# Altium PCB mainPCB.PcbDoc
Units mil, origin at the board's own origin, x right, y up, seen from the top; angles counter-clockwise.
Board outline 4245 x 925 mil, 4 copper layers (Top Layer, GND, 5V, Bottom Layer), stack 23.756 mil thick; 58 components, 40 nets, 233 pads, 87 vias.
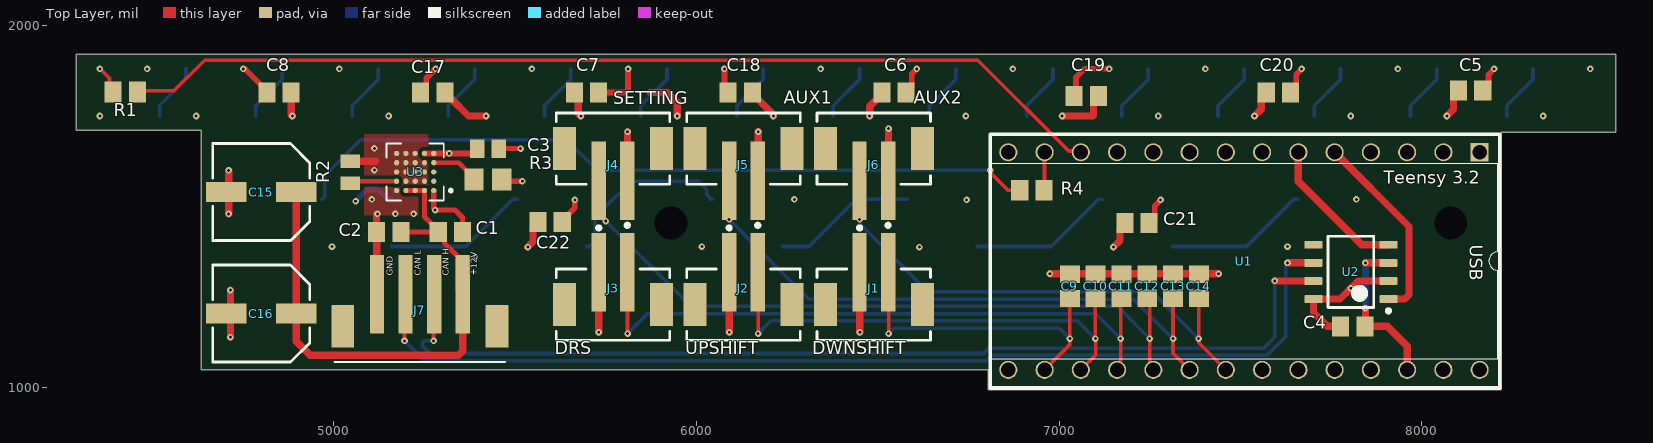
[diagram p0: Top Layer view]
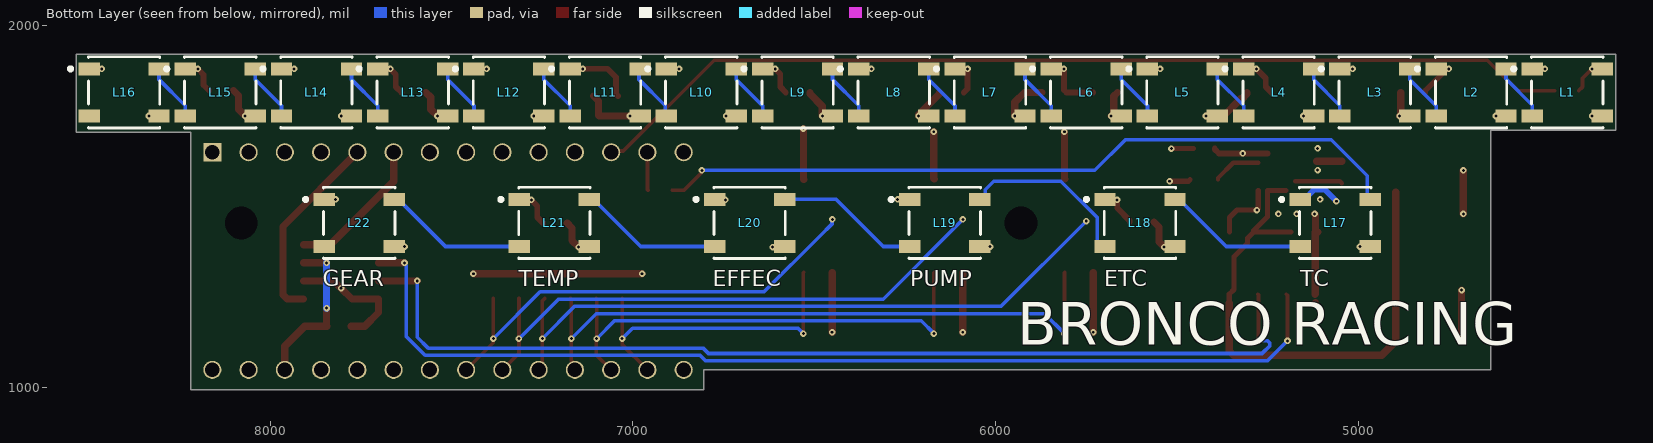
[diagram p1: Bottom Layer view, seen from below]
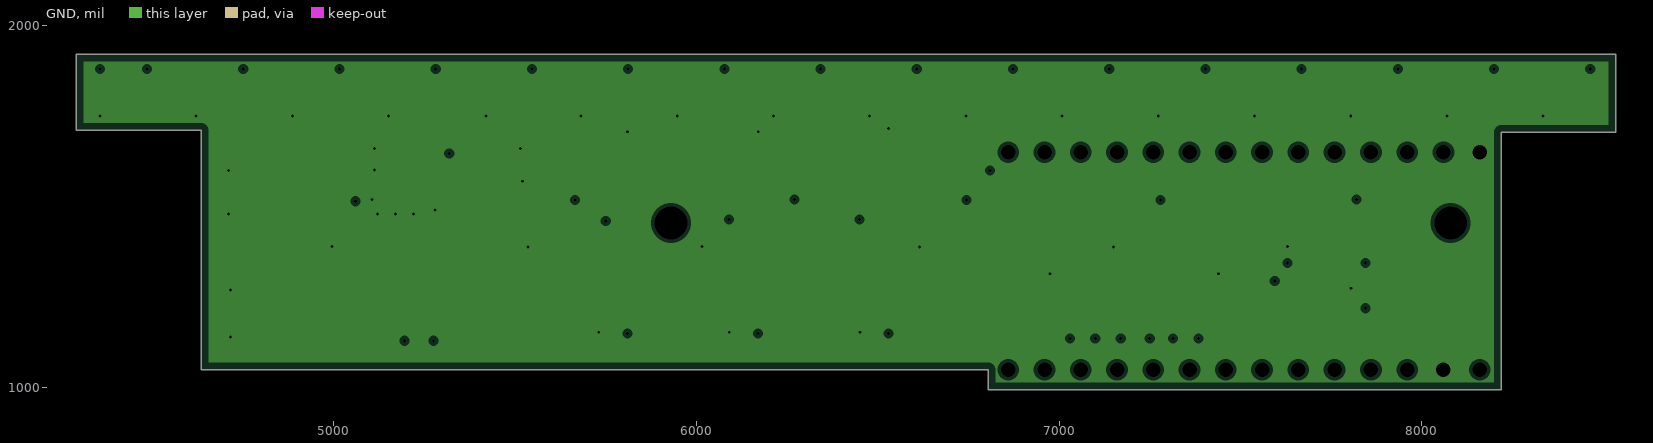
[diagram p2: GND, clearances drawn from the general rule]
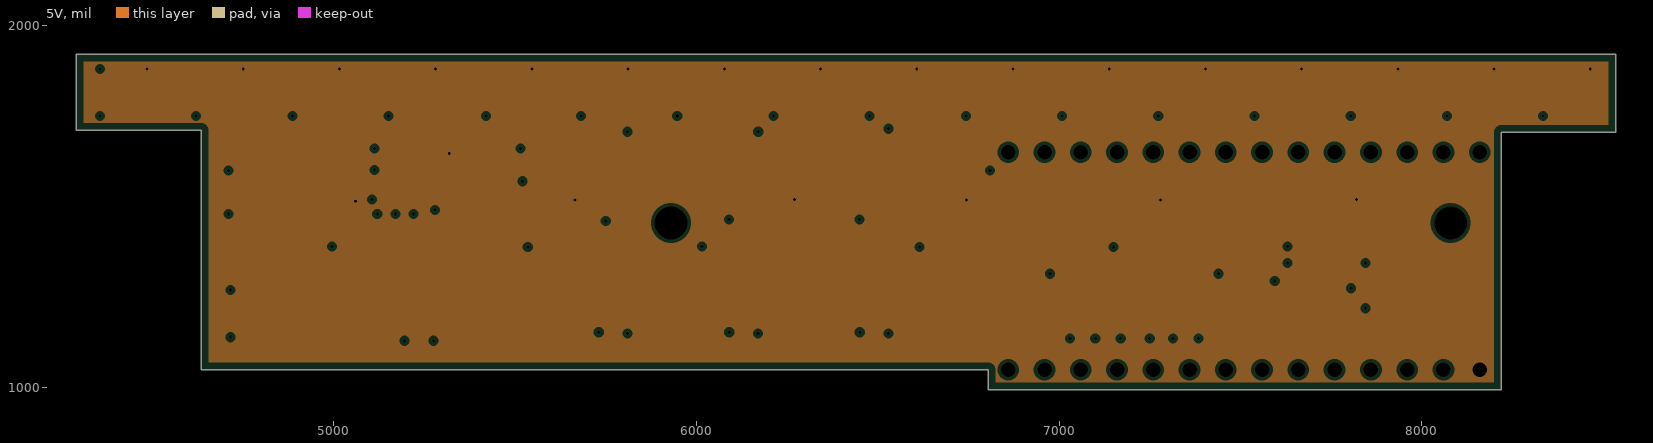
[diagram p3: 5V, clearances drawn from the general rule]
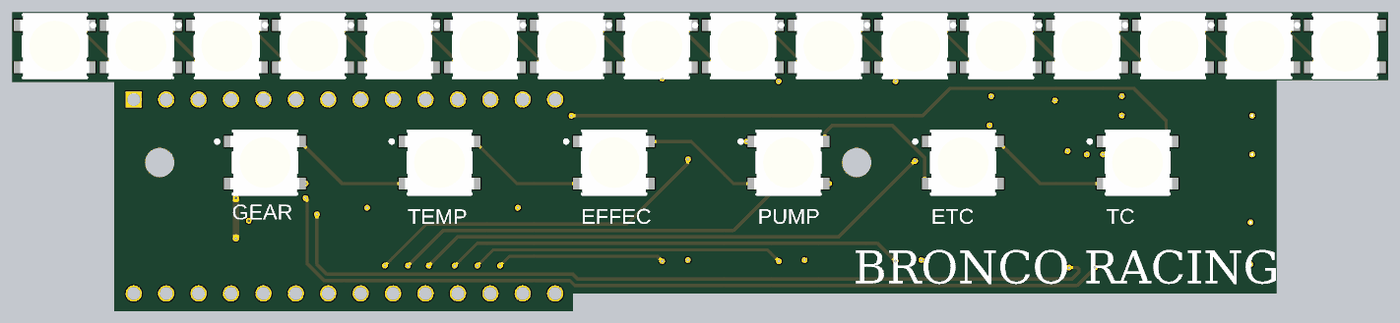
[diagram p4: 3D render of the assembled board from below, using the file's embedded part models]

## Layer stack, top to bottom
Top Solder: solder mask 0.4, Solder Resist, Dk 3.5
Top Layer: signal copper 1.4
Dielectric 2: prepreg 2.8, PP-006, Dk 4.1
GND: plane copper 1.378, net GND
Dielectric 1: dielectric 12.6, FR-4, Dk 4.8
5V: plane copper 1.378, net +5
Dielectric 3: prepreg 2.8, PP-006, Dk 4.1
Bottom Layer: signal copper 1.4
Bottom Solder: solder mask 0.4, Solder Resist, Dk 3.5

## Board outline
6805,1050 6805,995 8220,995 8220,1705 8535,1705 8535,1920 4290,1920 4290,1710 4635,1710 4635,1050

## Design rules (kind name [scope] priority, off if disabled: settings)
Clearance [All] p1: gap=10 ignorepadtopadclearanceinfootprint=FALSE except(0: Arc-Hole Track-Hole SMDPad-Hole THPad-Hole Via-Hole Fill-Hole Poly-Hole Region-Hole Text-Hole)
ComponentClearance TeensyClearance [HasFootprint('Teensy3_2')] p1: gap=0 collisioncheckmode=3 verticalgap=0 showdistances=FALSE
ComponentClearance [All] p2: gap=10 collisioncheckmode=3 verticalgap=10 showdistances=FALSE
PlaneClearance [All] p1: clearance=10
PlaneConnect [All] p1: planeconnectstyle=Relief reliefexpansion=20 reliefentries=4 reliefconductorwidth=10 reliefairgap=10
PolygonConnect [HasFootprint('*BGA25C65P5X5_400X400X198N_LTM8074IY#PBF(Primary)')] p1: connectstyle=Direct reliefconductorwidth=10 reliefentries=4 polygonreliefangle="90 Angle" airgapwidth=10
RoutingVias [All] p1: holewidth=10 width=20 viastyle="Through Hole" minholewidth=8 minwidth=18 maxholewidth=100 maxwidth=100
SolderMaskExpansion [All] p1: expansion=4 istentingtop=FALSE
Width [All] p1: maxlimit=20 minlimit=4 preferedwidth=10 minimp=50.000000 maximp=50.000000 favimp=50.000000
27 further rules are at their usual default settings.

## Components (designator, comment, footprint, x,y, rotation, side; value= is the part's Value field where it differs from the comment)
C1 "GRM216R61E105KA12D" CAPC2013X70X45NL10T25 5321.54,1430 r0 top
C2 "GRM216R61E105KA12D" CAPC2013X70X45NL10T25 5151.54,1430 r180 top
C3 "GRM21BR61C106KE15L" CAPC2013X135X50LL10T20 5425,1660 r0 top
C4 "GRM216R61E105KA12D" CAPC2013X70X45NL10T25 7810,1170 r180 top
C5 "GRM216R61E105KA12D" CAPC2013X70X45NL10T25 8135,1820 r180 top
C6 "GRM216R61E105KA12D" CAPC2013X70X45NL10T25 6545,1815 r180 top
C7 "GRM216R61E105KA12D" CAPC2013X70X45NL10T25 5697,1815 r180 top
C8 "GRM216R61E105KA12D" CAPC2013X70X45NL10T25 4849,1815 r0 top
C9 "GRM216R61E105KA12D" CAPC2013X70X45NL10T25 7030,1280 r90 top
C10 "GRM216R61E105KA12D" CAPC2013X70X45NL10T25 7101.09,1280 r90 top
C11 "GRM216R61E105KA12D" CAPC2013X70X45NL10T25 7172.19,1280 r90 top
C12 "GRM216R61E105KA12D" CAPC2013X70X45NL10T25 7243.28,1280 r90 top
C13 "GRM216R61E105KA12D" CAPC2013X70X45NL10T25 7314.37,1280 r90 top
C14 "GRM216R61E105KA12D" CAPC2013X70X45NL10T25 7385.47,1280 r90 top
C15 "EEE-FK1H220P" PNSC-EEE-FK1H220P_L 4800,1540 r180 top
C16 "EEE-FK1H220P" PNSC-EEE-FK1H220P_L 4800,1205 r180 top
C17 "GRM216R61E105KA12D" CAPC2013X70X45NL10T25 5273,1815 r0 top
C18 "GRM216R61E105KA12D" CAPC2013X70X45NL10T25 6121,1815 r0 top
C19 "GRM216R61E105KA12D" CAPC2013X70X45NL10T25 7075,1805 r0 top
C20 "GRM216R61E105KA12D" CAPC2013X70X45NL10T25 7605,1815 r180 top
C21 "GRM216R61E105KA12D" CAPC2013X70X45NL10T25 7215,1455 r180 top
C22 "GRM216R61E105KA12D" CAPC2013X70X45NL10T25 5596.54,1457.41 r180 top
J1 "B2B-PH-SM4-TB(LF)(SN)" JST-B2B-PH-SM4-TB-2_V 6489.37,1230 r0 top
J2 "B2B-PH-SM4-TB(LF)(SN)" JST-B2B-PH-SM4-TB-2_V 6129.69,1230 r0 top
J3 "B2B-PH-SM4-TB(LF)(SN)" JST-B2B-PH-SM4-TB-2_V 5770,1230 r0 top
J4 "B2B-PH-SM4-TB(LF)(SN)" JST-B2B-PH-SM4-TB-2_V 5770,1660 r180 top
J5 "B2B-PH-SM4-TB(LF)(SN)" JST-B2B-PH-SM4-TB-2_V 6129.69,1660 r180 top
J6 "B2B-PH-SM4-TB(LF)(SN)" JST-B2B-PH-SM4-TB-2_V 6489.37,1660 r180 top
J7 "B4B-PH-SM4-TB" *JST_B4B-PH-SM4-TB 5237.4,1258.56 r180 top
L1 "1655" ADA-RGB-1655_V 4423.43,1815 r180 bottom locked
L2 "1655" ADA-RGB-1655_V 4688.76,1815 r180 bottom locked
L3 "1655" ADA-RGB-1655_V 4954.09,1815 r180 bottom locked
L4 "1655" ADA-RGB-1655_V 5219.42,1815 r180 bottom locked
L5 "1655" ADA-RGB-1655_V 5484.76,1815 r180 bottom locked
L6 "1655" ADA-RGB-1655_V 5750.09,1815 r180 bottom locked
L7 "1655" ADA-RGB-1655_V 6015.42,1815 r180 bottom locked
L8 "1655" ADA-RGB-1655_V 6280.76,1815 r180 bottom locked
L9 "1655" ADA-RGB-1655_V 6546.09,1815 r180 bottom locked
L10 "1655" ADA-RGB-1655_V 6811.42,1815 r180 bottom locked
L11 "1655" ADA-RGB-1655_V 7076.76,1815 r180 bottom locked
L12 "1655" ADA-RGB-1655_V 7342.09,1815 r180 bottom locked
L13 "1655" ADA-RGB-1655_V 7607.42,1815 r180 bottom locked
L14 "1655" ADA-RGB-1655_V 7872.75,1815 r180 bottom locked
L15 "1655" ADA-RGB-1655_V 8138.09,1815 r180 bottom locked
L16 "1655" ADA-RGB-1655_V 8403.42,1815 r180 bottom locked
L17 "1655" ADA-RGB-1655_V 5063.43,1455 r180 bottom
L18 "1655" ADA-RGB-1655_V 5601.74,1455 r180 bottom
L19 "1655" ADA-RGB-1655_V 6140.06,1455 r180 bottom
L20 "1655" ADA-RGB-1655_V 6678.37,1455 r180 bottom
L21 "1655" ADA-RGB-1655_V 7216.69,1455 r180 bottom
L22 "1655" ADA-RGB-1655_V 7755,1455 r180 bottom
R1 "ERA6AEB201V" RESC2013X60X40NL20T25 4425,1815.98 r180 top
R2 "ERJ-6ENF4122V" RESC2013X70X40LL20T20 5045,1595 r90 top
R3 "ERJ-6ENF4532V" RESC2013X70X40ML20T20 5425,1575 r0 top
R4 "ERA6AEB201V" RESC2013X60X40NL20T25 6925,1545 r180 top
U1 "Teensy 3.2" Teensy3_2 8160,1650 r270 top locked
U2 "SN65HVD230DR" D0008A_L 7805,1320 r180 top
U3 "LTM8074IY#PBF" *BGA25C65P5X5_400X400X198N_LTM8074IY#PBF(Primary) 5224.41,1595.59 r180 top

## Footprints (in the part's own frame and the unit in brackets; to place one, negate y for a bottom-side part, rotate by r counter-clockwise, add the part's x,y. Pads: shape width x height; smd on the part's side, far side on the other; paste and mask are expansions set on the pad)
*BGA25C65P5X5_400X400X198N_LTM8074IY#PBF(Primary) [mm]
  round 0.37 smd: A1(-1.3,1.3) A2(-0.65,1.3) A3(0,1.3) A4(0.65,1.3) A5(1.3,1.3) B1(-1.3,0.65) B2(-0.65,0.65) B3(0,0.65) B4(0.65,0.65) B5(1.3,0.65) C1(-1.3,0) C2(-0.65,0) C3(0,0) C4(0.65,0) C5(1.3,0) D1(-1.3,-0.65) D2(-0.65,-0.65) D3(0,-0.65) D4(0.65,-0.65) D5(1.3,-0.65) E1(-1.3,-1.3) E2(-0.65,-1.3) E3(0,-1.3) E4(0.65,-1.3) E5(1.3,-1.3)
  silkscreen extent -2.6,-2 2,2
*JST_B4B-PH-SM4-TB [mm]
  rect 1x5.5 smd: 1(-3,0) 2(-1,0) 3(1,0) 4(3,0)
  rect 1.6x3 smd: P1(-5.4,2.25) P2(5.4,2.25)
  silkscreen extent -5.97,-2.73 5.97,4.75
ADA-RGB-1655_V [mm] "SMD, 4-Leads, Body 5x5mm"
  rect 1.5x0.9 smd: 1(-2.45,1.65) 2(-2.45,-1.65) 3(2.45,-1.65) 4(2.45,1.65)
  silkscreen extent -3.88,-2.5 2.5,2.5, body extent -2.7,-2.5 2.7,2.5, height 1.68
CAPC2013X70X45NL10T25 [mm] "Chip Capacitor, 2-Leads, Body 2.00x1.25mm, IPC Medium Density"
  rect 1.2x1.4 smd: 1(-0.85,0) 2(0.85,0)
  body extent -1.05,-0.67 1.05,0.67, height 0.7
CAPC2013X135X50LL10T20 [mm] "Chip Capacitor, 2-Leads, Body 2.00x1.25mm, IPC High Density"
  rect 1x1.3 smd: 1(-0.75,0) 2(0.75,0)
  body extent -1.05,-0.67 1.05,0.68, height 1.35
D0008A_L [mm] "SOIC, 8-Leads, Body 5x4mm, Pitch 1.27mm, IPC High Density"
  rrect18% 1.25x0.55 smd: 1(-2.625,1.905) 2(-2.625,0.635) 3(-2.625,-0.635) 4(-2.625,-1.905) 5(2.625,-1.905) 6(2.625,-0.635) 7(2.625,0.635) 8(2.625,1.905)
  silkscreen extent -2.75,-2.5 1.6,2.85, body extent -3,-2.45 3,2.45, height 1.63
JST-B2B-PH-SM4-TB-2_V [mm] "SMD, 2-Leads, Body 7.95x5mm, Pitch 2mm"
  rect 1x5.5 smd: 1(1,2.25) 2(-1,2.25)
  rect 1.6x3 smd: MP1(3.4,0) MP2(-3.4,0)
  silkscreen extent -3.98,-2.5 3.98,5.67, body extent -3.97,-2.5 3.97,4.5, height 6.6
PNSC-EEE-FK1H220P_L [mm] "CAPAE, 2-Leads, Base 6.6x6.6mm, IPC High Density"
  rect 2.85x1.4 smd: 1(-2.45,0) 2(2.45,0)
  silkscreen extent -3.4,-3.4 3.4,3.4, body extent -3.5,-3.4 3.5,3.4, height 6.1
RESC2013X60X40NL20T25 [mm] "Chip Resistor, 2-Leads, Body 2.00x1.25mm, IPC Medium Density"
  rect 1.2x1.45 smd: 1(-0.85,0) 2(0.85,0)
  body extent -1.1,-0.72 1.1,0.72, height 0.6
RESC2013X70X40LL20T20 [mm] "Chip Resistor, 2-Leads, Body 2.00x1.25mm, IPC High Density"
  rect 0.95x1.35 smd: 1(-0.775,0) 2(0.775,0)
  body extent -1.1,-0.72 1.1,0.72, height 0.7
RESC2013X70X40ML20T20 [mm] "Chip Resistor, 2-Leads, Body 2.00x1.25mm, IPC Low Density"
  rect 1.35x1.55 smd: 1(-0.975,0) 2(0.975,0)
  body extent -1.1,-0.72 1.1,0.72, height 0.7
Teensy3_2 [mil]
  rect 50x50 / inner rect 100x50 / far side rect 50x50 hole 40: 0(0,0)
  round 50 / inner oval 100x50 / far side round 50 hole 40: 1(0,-100) 2(0,-200) 3(0,-300) 4(0,-400) 5(0,-500) 6(0,-600) 7(0,-700) 8(0,-800) 9(0,-900) 10(0,-1000) 11(0,-1100) 12(0,-1200) 13(0,-1300) 14(600,-1300) 15(600,-1200) 16(600,-1100) 17(600,-1000) 18(600,-900) 19(600,-800) 20(600,-700) 21(600,-600) 22(600,-500) 23(600,-400) 24(600,-300) 25(600,-200) 26(600,-100) 27(600,0)
  silkscreen extent -50,-1350 650,55

## Part data
C1 C2 C4 C5 C6 C7 C8 C9 C10 C11 C12 C13 C14 C17 C18 C19 C20 C21 C22: library part CMP-2007-00957-1, Manufacturer=Murata, Part Number=GRM216R61E105KA12D
C3: library part CMP-2007-03453-1, Manufacturer=Murata, Part Number=GRM21BR61C106KE15L
C15 C16: library part CMP-2000-06209-1, "Cap Aluminum Lytic, 22 uF, +/- 20%, 6.3 to 100 V, -55 to 105 degC, 2-Pin SMD, RoHS, Tape and Reel", Capacitance=22µF, Case Size/Dimension=Ø6.3x5.8mm, Lifetime@Temperature=2000Hrs@105°C, Manufacturer=Panasonic, Operating Temp Range=-55to+105°C, Operating Temp-Max=105°C, Package Description="2-Pin Aluminum Electrolytic Capacitor, Base 6.6 x 6.6 mm, Height 6.10 mm", Rated Voltage=50V, Ripple Current=165mA, Datasheet URL=http://www.mouser.com/ds/2/315/ABA0000CE120-68386.pdf, Datasheet Version=03/2014, Impedance=0.88O, Manufacturer URL=http://www.panasonic.com/, Mounting Technology=SurfaceMount, Package Reference=EEE-FK1H220P, Series=FK, Type=Can
J1 J2 J3 J4 J5 J6: library part CMP-2000-05163-1, "Male Header, Pitch 2 mm, 1 x 2 Position, Height 6.6 mm, RoHS, Tape and Reel", Manufacturer=JST, Datasheet URL=https://ciiva.com/datasheet-click-26894756?src=ciiva&sig=90099765, Datasheet Version=Dec-12, Manufacturer URL=http://www.jst.com/home2.html, No of Positions=2, Pitch=2mm, Style/Orientation=StraightHeader/Plug, Termination=Crimp, Type=ShroudedHeader
J7: "Connector Header Surface Mount 4 position 0.079 _2.00mm_", Package=None, Availability=Unavailable, MF="JST Sales", MP=B4B-PH-SM4-TB, Price=None, SnapEDA_Link=https://www.snapeda.com/parts/B4B-PH-SM4-TB/JST%20Sales%20America%20Inc./view-part/48901/?ref=snap
L1 L2 L3 L4 L5 L6 L7 L8 L9 L10 L11 L12 L13 L14 L15 L16 L17 L18 L19 L20 L21 L22: library part CMP-2000-05026-1, "Intelligent Control LED Integrated Light Source, 3.5 to 5.3 V, -25 to 80 degC, 4-Pin SMD, RoHS, Tape and Reel", Color=Red,Green,Blue(RGB), Manufacturer=Adafruit-Industries-LLC, Package Description="4-Pin Surface Mount Device, Body 5 x 5 mm", Category=Optoelectronics, Configuration=Discrete, Controller Type=-, Datasheet URL=http://datasheet.octopart.com/ADA1655-Adafruit-Industries-datasheet-32028139.pdf, Datasheet Version=May-13, Family=Addressable,Specialty, Interface=-, Manufacturer URL=https://www.adafruit.com/, Mounting Type=SurfaceMount, Number of LEDs=10, Package Reference=1655, Series=Neopixel, Size / Dimension=5.00mmLx5.00mmW, Utilized LED=WS2812(5050)
R1 R4: library part CMP-2001-00608-1, Manufacturer=Panasonic, Part Number=ERA6AEB201V
R2: library part CMP-2001-00174-1, Manufacturer=Panasonic, Part Number=ERJ-6ENF4122V
R3: library part CMP-2001-00193-1, Manufacturer=Panasonic, Part Number=ERJ-6ENF4532V
U2: library part CMP-0315-00015-2, "3.3V CAN Transceiver with Standby Mode, 17 mA, -40 to 85 degC, 8-pin SOIC (D), Green (RoHS & no Sb/Br)", Drivers Per Package=1, Low Power Mode=Standby, Manufacturer="Texas Instruments", Rating=Catalog, Supply Voltage(s)(V)=3.3, Code_JEDEC=MS-012AA, ComponentLink1Description=Datasheet, ComponentLink1URL=http://www.ti.com/general/docs/lit/getliterature.tsp?genericPartNumber=SN65HVD230&fileType=pdf, DatasheetVersion=SLOS346K, Eco-Plan="Green (RoHS & no Sb/Br)", ICC(Max)(mA)=17, Isolated=No, Mounting Technology="Surface Mount", PackageDescription="8-Pin Plastic Small Outline Integrated Circuit, 4.9 x 3.9 mm, Pitch 1.27 mm Pitch", PackageReference=D0008A, PackageVersion="revM, Jun-2011", PartNumber=SN65HVD230DR, Receivers Per Package=1, SubFamily=CAN, Transient Pulse Protection(V)="-25 to 25"
U3: "40Vin, 0.7A Step Dwn uModule Reg", Package="BGA -25 Analog Devices", Availability=Unavailable, MF="Analog Devices", MP=LTM8074IY#PBF, Price=None, SnapEDA_Link=https://www.snapeda.com/parts/LTM8074IY%23PBF/Analog%20Devices/view-part/4335081/?ref=snap

## Free pads (board coordinates)
  round 60 hole 90: 2(5930,1455) 2(8080,1455)

## Via types
v1: diameter 18, hole 8, Top Layer to Bottom Layer, 87 vias

## Nets (pads, with @x,y where several pads share a name; then routed paths per layer and width w, separated by ;. In a path a pad name is that pad's centre, name@x,y a point inside that pad or via, vN(x,y) a via of type N, cw(c..) or ccw(c..) an arc to the next point about the centre after c; other vN are vias at no path point)
3V3: C4.1 U1.25 U2.3 | length 443.3
  Top Layer w20: v1(7845,1220) 7845,1171.54 C4.1 7905,1170 7960,1115 U1.25 ; v1(7845,1345) U2.3
  Bottom Layer w20: v1(7845,1220) v1(7845,1345)
+5: C3.1 C5.1 C6.1 C7.1 C8.1 C17.1 C18.1 C19.1 C20.1 C21.1 C22.1 L1.1 L2.1 L3.1 L4.1 L5.1 L6.1 L7.1 L8.1 L9.1 L10.1 L11.1 L12.1 L13.1 L14.1 L15.1 L16.1 L17.1 L18.1 L19.1 L20.1 L21.1 L22.1 U1.27 U3.E1 U3.E2 | length 1199.1
  Top Layer w16: v1(4750.33,1880) 4750.72,1879.62 4754.85,1879.62 4815.54,1818.94 C8.1 ; C17.1 5255.16,1830.62 5255.16,1854.16 v1(5281,1880) ; U3.E2 U3.E1 v1(5318.41,1646.77) 5383.79,1646.77 5395.47,1658.46 C3.1 ; C22.1 5630,1461.35 5664.62,1495.97 5664.62,1518.02 v1(5665,1518.4) ; C7.1 5804.74,1815 5811.28,1821.55 5811.28,1879.62 v1(5811.67,1880) ; v1(6077,1880) 6077.38,1879.62 6077.38,1825.15 C18.1 ; C6.1 6594.09,1830.62 6594.09,1865.88 6607.67,1879.46 v1(6607.67,1880) ; C19.1 7046.56,1810.02 7046.56,1856.56 7070,1880 v1(7138.33,1880) ; C21.1 7264.09,1470.62 7264.09,1501.95 7280,1517.86 v1(7280,1518.4) ; C20.1 7654.09,1830.62 7654.09,1864.55 7669,1879.46 v1(7669,1880) ; C5.1 8184.09,1835.62 8184.09,1863.88 8199.67,1879.46 v1(8199.67,1880)
  Bottom Layer w16: v1(5060,1515) 5092,1547 5121.03,1547 5148.07,1519.96 L17.1
  other v1: 6745,1518.4 6270,1520 7820,1520 4485,1880 5015.67,1880 5546.33,1880 6342.33,1880 6873,1880 7403.67,1880 7934.33,1880 8465,1880
+12: C1.1 C2.1 C15.1 C16.1 J7.1 U3.A2 U3.A3 U3.A4 | length 1532
  Top Layer w14: C2.1 C1.1 ; U3.A4 U3.A3 U3.A2 5250,1472.01 5288.07,1433.94 C1.1 ; J7.1@5355.51,1233.56 J7.1 5342.83,1271.25 5342.83,1361.8 5304.69,1399.93 5304.69,1413.38 C1.1
  Top Layer w20: C15.1 C16.1 4896.46,1128.54 4935,1090 5343.8,1090 5355.51,1101.72 J7.1@5355.51,1233.56
AUX1_BTN: C13.1 J5.1 U1.19 | length 1576
  Top Layer w10: C13.1 v1(7314.37,1136.08) 7314.37,1095.63 U1.19
  Bottom Layer w10: v1(6090,1465) 6310,1245 7205.45,1245 v1(7314.37,1136.08)
AUX2_BTN: C14.1 J6.1 U1.20 | length 1305.4
  Top Layer w10: C14.1 7385.47,1124.53 U1.20
  Bottom Layer w10: v1(6450,1465) 6451.22,1463.78 6451.22,1452.28 6485.13,1418.36 6638.5,1265 7256.08,1265 v1(7385,1136.08)
CANH: J7.2 U2.7 | length 2810.7
  Top Layer w10: v1(5275,1130) 5275,1256.79 J7.2
  Top Layer w20: v1(7595,1295) U2.7
  Bottom Layer w10: v1(5275,1130) 5250,1130 5244.14,1124.14 5244.14,1115.86 5265,1095 5275,1095 6791.72,1095 6806.72,1110 7565,1110 7595,1140 v1(7595,1295)
CANL: J7.3 U2.6 | length 2887.2
  Top Layer w10: v1(5195,1130) 5195,1255.53 J7.3
  Top Layer w20: v1(7630,1345) U2.6
  Bottom Layer w10: v1(5195,1130) 5250,1075 6800,1075 6815,1090 7573.28,1090 7625,1141.72 7625,1337.84 7630,1342.84 v1(7630,1345)
CANRXD: U1.5 U2.4 | length 400.8
  Top Layer w20: U1.5 7660,1570 7835,1395 U2.4
CANTXD: U1.4 U2.1 | length 539.7
  Top Layer w20: U1.4 7965,1445 7965,1256.72 7953.28,1245 U2.1
DOWNSHIFT_BTN: C9.1 J1.1 U1.15 | length 912.8
  Top Layer w10: J1.1 6530,1317.32 v1(6530,1150) ; U1.15 7030,1120 v1(7030,1136.08) C9.1
  Bottom Layer w10: v1(6530,1150) 6545,1165 7001.08,1165 v1(7030,1136.08)
DRS_BTN: C11.1 J3.1 U1.17 | length 1781.8
  Top Layer w10: J3.1 5810,1317.95 v1(5810,1150) ; U1.17 7167.65,1057.65 7167.65,1073.51 7170,1075.86 v1(7170,1136.08) 7170,1244.35 C11.1
  Bottom Layer w10: v1(5810,1150) 5865,1205 7101.08,1205 v1(7170,1136.08)
GND: C1.2 C2.2 C3.2 C4.2 C5.2 C6.2 C7.2 C8.2 C9.2 C10.2 C11.2 C12.2 C13.2 C14.2 C15.2 C16.2 C17.2 C18.2 C19.2 C20.2 C21.2 C22.2 J1.2 J2.2 J3.2 J4.2 J5.2 J6.2 J7.4 L1.3 L2.3 L3.3 L4.3 L5.3 L6.3 L7.3 L8.3 L9.3 L10.3 L11.3 L12.3 L13.3 L14.3 L15.3 L16.3 L17.3 L18.3 L19.3 L20.3 L21.3 L22.3 R2.2 R3.2 U1.0 U1.26 U2.2 U2.8 U3.A1 U3.A5 U3.B2 U3.B3 U3.B4 U3.C2 U3.C3 U3.C4 U3.C5 U3.D2 U3.D3 U3.D4 U3.D5 U3.E3 U3.E4 U3.E5 | length 3604.4
  Top Layer w14: U3.A1 5275.59,1495.49 5279.41,1491.67 v1(5279.41,1490.59) 5334.41,1490.59 5355,1470 C1.2 ; C3.2 v1(5515,1660) ; R3.2 5468.39,1570 v1(5520,1570)
  Top Layer w20: v1(4710,1480) v1(4710,1600) ; v1(4715,1140) v1(4715,1270) ; C8.2 4882.46,1753.2 v1(4885.67,1750) ; R2.2 5114.49,1625.51 5115,1625 ; C2.2@5111.54,1430 C2.2@5112.91,1428.62 ; J7.4@5117.91,1234.94 J7.4@5119.29,1233.56 ; J7.4 5118.68,1259.17 5118.68,1429.39 C2.2 5118.07,1478.07 v1(5120,1480) ; C17.2 5306.46,1811.06 5320.09,1797.44 5324.02,1797.44 5371.46,1750 v1(5420,1750) ; v1(5535,1388.4) 5549.45,1402.85 5549.45,1443.79 C22.2 ; C7.2 5674.23,1804.31 5674.23,1757.44 v1(5681.67,1750) ; v1(5730.63,1153.58) J3.2 ; J4.2@5809.37,1576.42 5810,1577.05 v1(5810,1706.42) ; 5871.67,1815 5920,1815 5947,1788 v1(5947,1750) ; J2.2 6090.63,1318.27 v1(6090.63,1153.58) ; C18.2 6154.46,1811.06 6212.33,1753.19 v1(6212.33,1750) ; J5.2@6169.37,1576.42 6170.63,1577.68 v1(6170.63,1706.42) ; J1.2 6450.63,1317.95 v1(6450.63,1153.58) ; v1(6477.67,1750) 6477.67,1777.19 6511.54,1811.06 C6.2 ; J6.2@6528.74,1575 6530,1576.26 v1(6530,1715) ; v1(6975,1315) v1(7440,1315) ; v1(7008.33,1750) 7093.28,1750 7094.84,1751.56 7094.84,1791.38 C19.2 ; v1(7150,1388.4) 7167.91,1406.32 7167.91,1441.38 C21.2 ; v1(7539,1750) 7557.91,1768.91 7557.91,1801.38 C20.2 ; C4.2 7740,1170 7701.65,1208.35 U2.8 7775,1245 v1(7805,1275) 7825,1295 U2.2 ; v1(8069.67,1750) 8087.91,1768.25 8087.91,1806.38 C5.2
  other v1: 6615,1388.4 4995,1390 6015,1390 7630,1390 5170,1480 5220,1480 5105,1520 5111.93,1600.59 5111.93,1660.59 4355,1750 4620.33,1750 5151,1750 6743,1750 7273.67,1750 7804.33,1750 8335,1750
LED_DRIVE: R1.1 U1.11 | length 2741.5
  Top Layer w10: R1.1@4458.46,1820 4560,1820 4644,1904 6776,1904 7026.72,1653.28 7056.72,1653.28 U1.11
LED_DRIVE2: R4.1 U1.12 | length 105.6
  Top Layer w10: R4.1 6960,1546.54 U1.12
NetL1_2: L1.2 L2.4 | length 159.9
  Bottom Layer w10: L1.2 4519.88,1779.88 4592.3,1852.3 L2.4
NetL1_4: L1.4 R1.2 | length 75.1
  Top Layer w10: v1(4355,1880) 4381.33,1853.67 4381.33,1830.21 R1.2@4391.54,1820
NetL2_2: L2.2 L3.4 | length 159.9
  Bottom Layer w10: L2.2 4785.21,1778.21 4857.63,1850.63 L3.4
NetL3_2: L3.2 L4.4 | length 159.9
  Bottom Layer w10: L3.2 5050.55,1778.21 5122.97,1850.63 L4.4
NetL4_2: L4.2 L5.4 | length 159.9
  Bottom Layer w10: L4.2 5315.88,1778.21 5388.3,1850.63 L5.4
NetL5_2: L5.2 L6.4 | length 159.9
  Bottom Layer w10: L5.2@5580.88,1750.04 5580.88,1778.21 5653.3,1850.63 L6.4@5653.3,1879.96
NetL6_2: L6.2 L7.4 | length 159.9
  Bottom Layer w10: L6.2 5846.55,1778.21 5918.97,1850.63 L7.4
NetL7_2: L7.2 L8.4 | length 159.9
  Bottom Layer w10: L7.2 6111.88,1778.21 6184.3,1850.63 L8.4
NetL8_2: L8.2 L9.4 | length 159.9
  Bottom Layer w10: L8.2 6377.21,1778.21 6449.63,1850.63 L9.4
NetL9_2: L9.2 L10.4 | length 159.9
  Bottom Layer w10: L9.2 6642.55,1778.21 6714.97,1850.63 L10.4
NetL10_2: L10.2 L11.4 | length 159.9
  Bottom Layer w10: L10.2@6910.88,1750.04 6910.88,1778.21 6983.3,1850.63 L11.4@6983.3,1879.96
NetL11_2: L11.2 L12.4 | length 159.9
  Bottom Layer w10: L11.2 7173.21,1778.21 7245.63,1850.63 L12.4
NetL12_2: L12.2 L13.4 | length 159.9
  Bottom Layer w10: L12.2 7438.54,1778.21 7510.96,1850.63 L13.4
NetL13_2: L13.2 L14.4 | length 159.9
  Bottom Layer w10: L13.2 7703.88,1778.21 7776.3,1850.63 L14.4
NetL14_2: L14.2 L15.4 | length 159.9
  Bottom Layer w10: L14.2 7969.21,1778.21 8041.63,1850.63 L15.4
NetL15_2: L15.2 L16.4 | length 159.9
  Bottom Layer w10: L15.2 8234.54,1778.21 8306.96,1850.63 L16.4
NetL17_2: L17.2 L18.4 | length 399.2
  Bottom Layer w10: L17.2 5363.55,1390.04 5493.47,1519.96 L18.4
NetL17_4: L17.4 R4.2 | length 2087.2
  Top Layer w10: v1(6810,1600) 6811.53,1598.47 6811.53,1592.92 6858.77,1545.68 6890.85,1545.68 R4.2
  Bottom Layer w10: L17.4 4975,1527.99 4975,1585 5074.59,1684.59 5641.92,1684.59 5726.51,1600 v1(6810,1600)
NetL18_2: L18.2 L19.4 | length 488.3
  Bottom Layer w10: L18.2 5707.28,1390.04 5720,1402.76 5720,1470 5820,1570 6005,1570 6028.18,1546.82 6028.18,1532.68 6040.9,1519.96 L19.4
NetL19_2: L19.2 L20.4 | length 399.2
  Bottom Layer w10: L19.2 6310.04,1390.04 6440,1520 L20.4 L20.4
NetL20_2: L20.2 L21.4 | length 399.2
  Bottom Layer w10: L20.2 6978.5,1390.04 7108.42,1519.96 L21.4
NetL21_2: L21.2 L22.4 | length 399.2
  Bottom Layer w10: L21.2 7516.81,1390.04 7646.73,1519.96 L22.4
NetR2_1: R2.1 U3.B5 | length 130.5
  Top Layer w12: R2.1 5050.51,1570 U3.B5
NetR3_1: R3.1 U3.D1 | length 132.5
  Top Layer w12: U3.D1 5344.37,1621.18 5386.61,1578.94 R3.1
SET_BTN: C12.1 J4.1 U1.18 | length 1837.6
  Top Layer w10: C12.1 7250,1239.81 v1(7250,1136.08) 7250,1070.82 7260,1060.82 U1.18
  Bottom Layer w10: v1(5750,1460) 5985,1225 7161.08,1225 v1(7250,1136.08)
UPSHIFT_BTN: C10.1 J2.1 U1.16 | length 1347.7
  Top Layer w10: J2.1 6170,1317.64 v1(6170,1150) ; U1.16 7101.09,1091.09 v1@7101.09,1136.08 ; v1(7100,1136.08) 7100,1245.44 C10.1
  Bottom Layer w10: v1(6170,1150) 6205,1185 7051.08,1185 v1(7100,1136.08)
pads on no net: J1.MP1 J1.MP2 J2.MP1 J2.MP2 J3.MP1 J3.MP2 J4.MP1 J4.MP2 J5.MP1 J5.MP2 J6.MP1 J6.MP2 J7.P1 J7.P2 L16.2 L22.2 U1.1 U1.2 U1.3 U1.6 U1.7 U1.8 U1.9 U1.10 U1.13 U1.14 U1.21 U1.22 U1.23 U1.24 U2.5 U3.B1 U3.C1

## Polygon pours and split planes (outlines as drawn)
no net on Bottom Overlay "NONET_L-01_P-001" (solid): 5170,1560
GND on Top Layer "GND_L01_P000" (solid, remove dead copper, pour order 0): 5260,1475.59 5084.41,1475.59 5084.41,1700 5260,1700
GND on GND (split plane): 8514.9,1725.1 8220,1725.1 8216.08,1724.71 8212.31,1723.57 8208.83,1721.71 8205.79,1719.21 8203.29,1716.17 8201.43,1712.69 8200.29,1708.92 8199.9,1705 8199.9,1015.1 6825.1,1015.1 6825.1,1050 6824.71,1053.92 6823.57,1057.69 6821.71,1061.17 6819.21,1064.21 6816.17,1066.71 6812.69,1068.57 6808.92,1069.71 6805,1070.1 4655.1,1070.1 4655.1,1710 4654.71,1713.92 4653.57,1717.69 4651.71,1721.17 4649.21,1724.21 4646.17,1726.71 4642.69,1728.57 4638.92,1729.71 4635,1730.1 4310.1,1730.1 4310.1,1899.9 8514.9,1899.9
+5 on 5V (split plane): 8514.9,1725.1 8220,1725.1 8216.08,1724.71 8212.31,1723.57 8208.83,1721.71 8205.79,1719.21 8203.29,1716.17 8201.43,1712.69 8200.29,1708.92 8199.9,1705 8199.9,1015.1 6825.1,1015.1 6825.1,1050 6824.71,1053.92 6823.57,1057.69 6821.71,1061.17 6819.21,1064.21 6816.17,1066.71 6812.69,1068.57 6808.92,1069.71 6805,1070.1 4655.1,1070.1 4655.1,1710 4654.71,1713.92 4653.57,1717.69 4651.71,1721.17 4649.21,1724.21 4646.17,1726.71 4642.69,1728.57 4638.92,1729.71 4635,1730.1 4310.1,1730.1 4310.1,1899.9 8514.9,1899.9

## Silkscreen, mask and mechanical layers (free items; w line width, h text height)
Top Overlay:
  text "AUX1" at 6240.3,1770.66 h60
  text "AUX2" at 6599.98,1770.66 h60
  text "SETTING" at 5770.65,1770.19 h60
  text "Teensy 3.2" at 7895.37,1551.29 h60
  text "GND" at 5169.67,1310 h30 r90
  text "CAN L" at 5247.03,1310 h30 r90
  text "CAN H" at 5324.07,1310 h30 r90
  text "+12V" at 5401.44,1310 h30 r90
  text "DRS" at 5610,1080.66 h60
  text "UPSHIFT" at 5969.78,1080.66 h60
  text "DWNSHIFT" at 6320.02,1080.66 h60
Bottom Overlay:
  text "TC" at 5160,1265.82 h75
  text "ETC" at 5700,1265.82 h75
  text "PUMP" at 6235,1265.82 h75
  text "EFFEC" at 6780,1265.82 h75
  text "TEMP" at 7315,1265 h75
  text "GEAR" at 7855,1265 h75
  text "BRONCO RACING" at 5939.9,1081.15 h200

## Text inside footprints (layer, text, board x,y; h text height)
U1: Top Overlay "USB" at 8120.66,1395 h60 r270